# EAGLE board CT_schematic (EAGLE 7.6.0)

Size 100 x 80 mm. Coordinates in mm from the lower left corner, seen from the top.
Outline: 0,0 100,0 100,80 0,80 0,0
Copper layers (1*16): Top 0.035mm / dielectric 1.5mm / Bottom 0.035mm
Design rules "default": minimum track width 10mil, minimum drill 24mil, track to track 8mil, track to pad 8mil, pad to pad 8mil, via to via 8mil, smd to smd 8mil, copper to edge 40mil, drill to drill 8mil, minimum pad ring 10mil, minimum via ring 8mil, stop-mask expansion 4mil, vias tented up to drill 0mil, thermal gap 10mil

## Footprints (pad centres in the part's own frame; a part is rotated, then mirrored left to right if it is on the bottom)
C0603 = smd 0.8 x 0.8: 1 -0.762,0; 2 0.762,0
C0402 = smd 0.5 x 0.5: 1 -0.508,0; 2 0.508,0
C0805 = smd 1.2 x 1.3: 1 -1.016,0; 2 1.016,0
C1206 = smd 1.3 x 1.6: 1 -1.524,0; 2 1.524,0
L0603 = smd 0.8 x 0.8: 1 -0.762,0; 2 0.762,0
L0806 = smd 1.016 x 1.524: 1 -0.889,0; 2 0.889,0
R0603 = smd 0.8 x 0.8: 1 -0.762,0; 2 0.762,0
LQFP32 = smd 0.54 x 0.85: 1 -2.8,-4.275; 2 -2,-4.275; 3 -1.2,-4.275; 4 -0.4,-4.275; 5 0.4,-4.275; 6 1.19,-4.275; 7 1.99,-4.275; 8 2.79,-4.275; 17 2.8,4.275; 18 2,4.275; 19 1.2,4.275; 20 0.4,4.275; 21 -0.4,4.275; 22 -1.2,4.275; 23 -2,4.275; 24 -2.8,4.275 | smd 0.85 x 0.54: 9 4.275,-2.8; 10 4.275,-2; 11 4.275,-1.2; 12 4.275,-0.4; 13 4.275,0.4; 14 4.275,1.2; 15 4.275,2; 16 4.275,2.8; 25 -4.275,2.8; 26 -4.275,2; 27 -4.275,1.2; 28 -4.275,0.4; 29 -4.275,-0.4; 30 -4.275,-1.2; 31 -4.275,-2; 32 -4.275,-2.8
SOIC-8 = smd 1.6 x 0.6: 1 -2.7,1.905 | smd 1.55 x 0.6: 2 -2.7,0.635; 3 -2.7,-0.635; 4 -2.7,-1.905; 5 2.7,-1.905; 6 2.7,-0.635; 7 2.7,0.635; 8 2.7,1.905
SAMTEC_FTSH-105-01-L-DV-K = smd 0.762 x 2.794: 1 -2.54,-2.032; 2 -2.54,2.032; 3 -1.27,-2.032; 4 -1.27,2.032; 5 0,-2.032; 6 0,2.032; 7 1.27,-2.032; 8 1.27,2.032; 9 2.54,-2.032; 10 2.54,2.032
ASFL1 = smd 1.7 x 1.5: 1 -1.27,-1.1; 2 1.27,-1.1; 3 1.27,1.1; 4 -1.27,1.1
TSOT-23-5 = smd 1.3 x 0.62: 1 -1.31,0.95; 2 -1.31,0; 3 -1.31,-0.95; 4 1.31,-0.95; 5 1.31,0.95
DFN8_2X3MC = smd 0.813 x 0.305: 1 -1.398,0.75; 2 -1.398,0.25; 3 -1.398,-0.25; 4 -1.398,-0.75; 5 1.398,-0.75; 6 1.398,-0.25; 7 1.398,0.25; 8 1.398,0.75 | smd 1.753 x 1.549: 9 0,0
JST-2-SMD = smd 1 x 4.6: 1 -1,-3.7; 2 1,-3.7 | smd 1.6 x 3.4: NC1 -3.4,1.5; NC2 3.4,1.5
FCI_10118193-0001LF = smd 0.4 x 1.35: 1 -1.3,2.675; 2 -0.65,2.675; 3 0,2.675; 4 0.65,2.675; 5 1.3,2.675 | smd 1.6 x 1.4: 6 -3.2,2.45; 7 3.2,2.45 | smd 1.9 x 1.9: 8 -1.2,0; 9 1.2,0 | hole 0.5: -3.3,0; 3.3,0
SON-6 = smd 0.55 x 0.3: 1 -0.355,0.5 | smd 0.52 x 0.3: 2 -0.37,0; 3 -0.37,-0.5; 4 0.37,-0.5; 5 0.37,0; 6 0.37,0.5
SW_4-1437565-2 = smd 1.4 x 2.1: 1 -2.23,4.55; 2 -2.23,-4.55; 3 2.23,4.55; 4 2.23,-4.55
LGM67K-G1J2-24-Z = smd 0.8 x 1.4: A -2,0; C 0,0
NC7SZ125M5X = smd 1.3 x 0.7: 1 -1.3,0.95; 2 -1.3,0; 3 -1.3,-0.95; 4 1.3,-0.95; 5 1.3,0.95

## Placement (x,y rotation side)
C1  1e-07  [C0603]  -38.1,49.53 0 top  (outside the outline)
C2  1e-07  [C0603]  -41.91,49.53 0 top  (outside the outline)
C3  4.7e-06  [C0603]  -34.29,49.53 0 top  (outside the outline)
C4  1e-08  [C0603]  -45.72,49.53 0 top  (outside the outline)
C5  1e-08  [C0603]  -49.53,49.53 0 top  (outside the outline)
C6  1e-06  [C0603]  -53.34,49.53 0 top  (outside the outline)
C7  1e-08  [C0402]  -34.29,54.61 0 top  (outside the outline)
C8  1e-07  [C0402]  -38.1,54.61 0 top  (outside the outline)
C9  1e-08  [C0402]  -41.91,54.61 0 top  (outside the outline)
C10  1e-05  [C0805]  -40.64,38.1 0 top  (outside the outline)
C11  1e-05  [C0805]  -45.72,38.1 0 top  (outside the outline)
C12  1e-07  [C0402]  -45.72,54.61 0 top  (outside the outline)
C13  1e-05  [C1206]  -57.15,29.21 0 top  (outside the outline)
C14  1e-05  [C1206]  -16.51,39.37 0 top  (outside the outline)
C15  1e-08  [C0402]  -49.53,54.61 0 top  (outside the outline)
C16  1e-08  [C0402]  -53.34,54.61 0 top  (outside the outline)
F1  240.0  [L0603]  -57.15,49.53 0 top  (outside the outline)
I1  3.3e-06  [L0806]  -22.86,39.37 0 top  (outside the outline)
R1  10000.0  [R0603]  -30.48,44.45 0 top  (outside the outline)
R2  1000.0  [R0603]  -60.96,49.53 0 top  (outside the outline)
R3  1600.5  [R0603]  -15.24,54.61 0 top  (outside the outline)
R4  4700.0  [R0603]  -19.05,54.61 0 top  (outside the outline)
R5  10000.0  [R0603]  -35.56,44.45 0 top  (outside the outline)
R6  10000.0  [R0603]  -40.64,44.45 0 top  (outside the outline)
R7  10000.0  [R0603]  -45.72,44.45 0 top  (outside the outline)
R8  10000.0  [R0603]  -50.8,44.45 0 top  (outside the outline)
R9  10000.0  [R0603]  -55.88,44.45 0 top  (outside the outline)
R10  10000.0  [R0603]  -60.96,44.45 0 top  (outside the outline)
R11  10000.0  [R0603]  -15.24,49.53 0 top  (outside the outline)
R12  5.0  [R0603]  -22.86,54.61 0 top  (outside the outline)
R13  220000.0  [R0603]  -15.24,44.45 0 top  (outside the outline)
R14  1000000.0  [R0603]  -58.42,38.1 0 top  (outside the outline)
R15  10000.0  [R0603]  -20.32,49.53 0 top  (outside the outline)
R16  10000.0  [R0603]  -25.4,49.53 0 top  (outside the outline)
R17  9100.0  [R0603]  -26.67,54.61 0 top  (outside the outline)
R18  680000.0  [R0603]  -20.32,44.45 0 top  (outside the outline)
R19  120000.0  [R0603]  -25.4,44.45 0 top  (outside the outline)
R20  2000.0  [R0603]  -30.48,54.61 0 top  (outside the outline)
R21  10000.0  [R0603]  -30.48,49.53 0 top  (outside the outline)
U1  stm32f051k6t6  [LQFP32]  -52.07,7.62 0 top  (outside the outline)
U2  AT25M02-SSHD-T  [SOIC-8]  -58.42,20.32 0 top  (outside the outline)
U3  FTSH-105-01-L-DV-K  [SAMTEC_FTSH-105-01-L-DV-K]  -35.56,7.62 0 top  (outside the outline)
U4  ASFL1-25MHZ-NCS  [ASFL1]  -26.67,30.48 0 top  (outside the outline)
U5  ltc3406es5  [TSOT-23-5]  -50.8,38.1 0 top  (outside the outline)
U6  MCP73831T-2ACI/MC  [DFN8_2X3MC]  -15.24,58.42 0 top  (outside the outline)
U7  S2B-PH-SM4-TB(LF)(SN)  [JST-2-SMD]  -41.91,21.59 0 top  (outside the outline)
U8  10118193-0001LF  [FCI_10118193-0001LF]  -35.56,30.48 0 top  (outside the outline)
U9  TPS3895ADRYR  [SON-6]  -55.88,53.34 0 top  (outside the outline)
U10  4-1437565-2  [SW_4-1437565-2]  -27.94,20.32 0 top  (outside the outline)
U11  Q65110A2395  [LGM67K-G1J2-24-Z]  -45.72,29.21 0 top  (outside the outline)
U12  nc7sz125m5x  [NC7SZ125M5X]  -27.94,38.1 0 top  (outside the outline)
U13  nc7sz125m5x  [NC7SZ125M5X]  -34.29,38.1 0 top  (outside the outline)

## Library data of the parts
C1-C16 F1 I1 R1-R21 U1-U13 = circuit_tree

## Nets
CLK_U1_2: U1.2 U4.3
GND: C1.2 C2.2 C3.2 C4.2 C5.2 C6.2 C7.2 C8.2 C9.2 C10.2 C11.1 C11.2 C12.2 C13.2 C14.2 C15.2 C16.2 R2.2 R5.2 R12.2 R13.2 R17.2 R19.2 R20.2 U1.16 U1.32 U2.4 U3.3 U3.5 U4.2 U5.2 U6.6 U6.9 U7.2 U8.5 U8.6 U8.7 U8.8 U8.9 U9.2 U11.C U12.2 U12.3 U13.1 U13.3
INPUT_USBPOWER_5V: C13.1 R21.2 U6.1 U6.2 U8.1
NET_U1_4: R4.1 U1.4 U13.4
NET_U1_5: C4.1 C5.1 C6.1 F1.1 U1.5
NET_U1_29: R3.1 U1.29 U11.A
NET_U1_30: R1.1 U1.30 U10.3 U10.4
NET_U1_31: R5.1 U1.31
NET_U2_3: R6.1 U2.3
NET_U2_7: R8.1 U2.7
NET_U3_9: R12.1 U3.9
NET_U5_1: U5.1
NET_U5_3: I1.1 U5.3
NET_U5_5: R13.1 R14.1 U5.5
NET_U5_ATNET_3: I1.2 R14.2
NET_U6_5: R21.1 U6.5
NET_U6_8: R20.1 U6.8
NET_U9_1: R16.1 R17.1 U9.1
NET_U9_3: R18.2 R19.1 U9.3
NET_U9_4: R15.1 U9.4 U12.4 U13.2
NET_U10_1: R2.1 U10.1 U10.2
PROC_SPI1_MISO: U1.12 U2.2
PROC_SPI1_MOSI: U1.13 U2.5
PROC_SPI1_NSS: R7.1 U1.10 U2.1
PROC_SPI1_SCK: U1.11 U2.6
PROC_SYS_SWCLK: R10.1 U1.24 U3.4
PROC_SYS_SWDIO: R11.1 U1.23 U3.2
RST_OUT_U3_JTAG_RST_B: R9.1 U3.10 U12.1
VCC_S1_3V7: C10.1 C14.1 U5.4 U6.3 U6.4 U7.1
VCC_TIER1_3V3: C1.1 C2.1 C3.1 C7.1 C8.1 C9.1 C11.2 C12.1 C15.1 C16.1 F1.2 I1.2 R1.2 R3.2 R4.2 R6.2 R7.2 R8.2 R9.2 R10.2 R11.2 R14.2 R15.2 R16.2 R18.1 U1.1 U1.17 U2.8 U3.1 U4.4 U9.6 U12.5 U13.5

## Tracks (layer width: path | path; a pad name or v marks a point on that pad's centre or on a via)
CLK_U1_2  (1 unrouted)
GND  (44 unrouted)
INPUT_USBPOWER_5V  (4 unrouted)
NET_U1_4  (2 unrouted)
NET_U1_5  (4 unrouted)
NET_U1_29  (2 unrouted)
NET_U1_30  (3 unrouted)
NET_U1_31  (1 unrouted)
NET_U2_3  (1 unrouted)
NET_U2_7  (1 unrouted)
NET_U3_9  (1 unrouted)
NET_U5_3  (1 unrouted)
NET_U5_5  (2 unrouted)
NET_U5_ATNET_3  (1 unrouted)
NET_U6_5  (1 unrouted)
NET_U6_8  (1 unrouted)
NET_U9_1  (2 unrouted)
NET_U9_3  (2 unrouted)
NET_U9_4  (3 unrouted)
NET_U10_1  (2 unrouted)
PROC_SPI1_MISO  (1 unrouted)
PROC_SPI1_MOSI  (1 unrouted)
PROC_SPI1_NSS  (2 unrouted)
PROC_SPI1_SCK  (1 unrouted)
PROC_SYS_SWCLK  (2 unrouted)
PROC_SYS_SWDIO  (2 unrouted)
RST_OUT_U3_JTAG_RST_B  (2 unrouted)
VCC_S1_3V7  (5 unrouted)
VCC_TIER1_3V3  (32 unrouted)